# Altium PCB PCB1.pcbdoc (part 1 of 2)
Units mil, origin at the board's own origin, x right, y up, seen from the top; angles counter-clockwise.
Board outline 4560 x 3575 mil, 4 copper layers (Top Layer, GND, Inner2, Bottom Layer); 136 components, 94 nets, 575 pads, 341 vias.
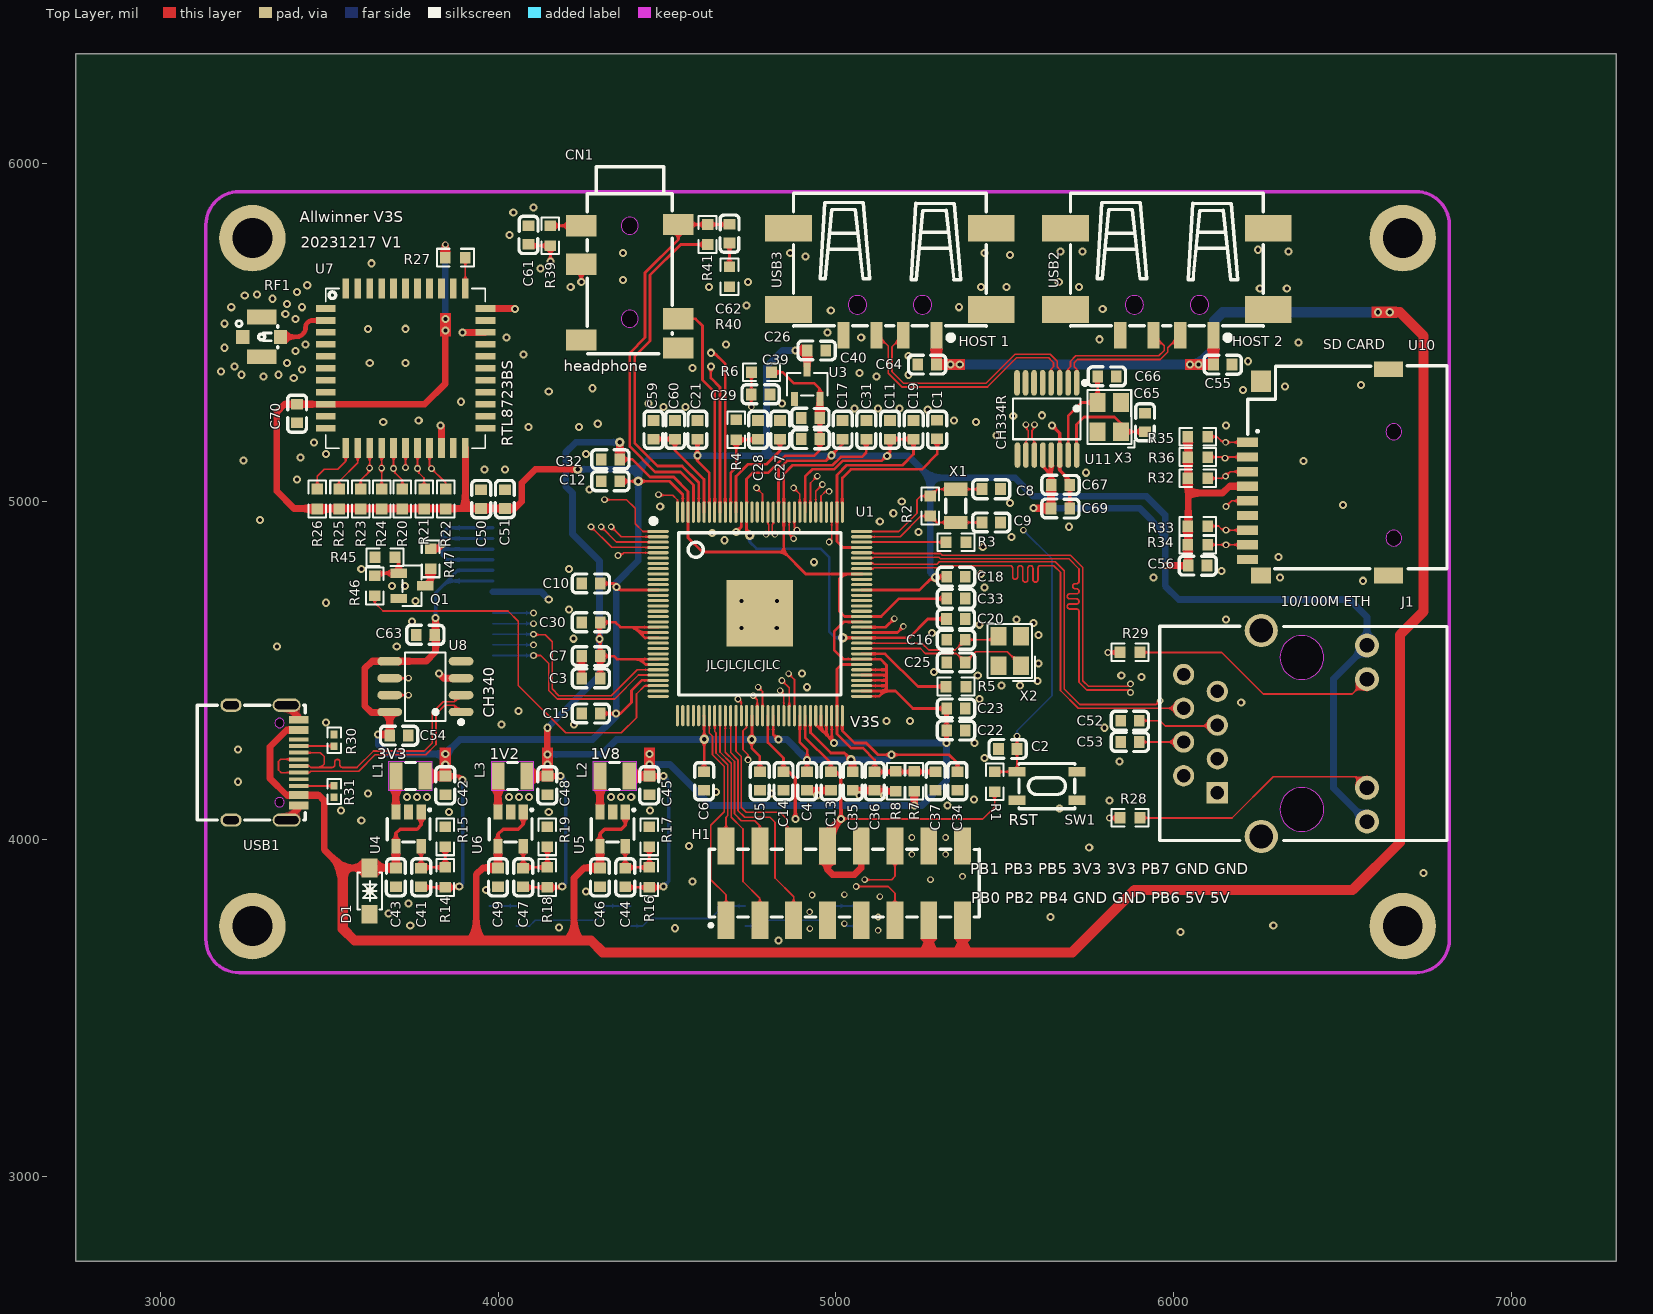
[diagram p0: Top Layer view]
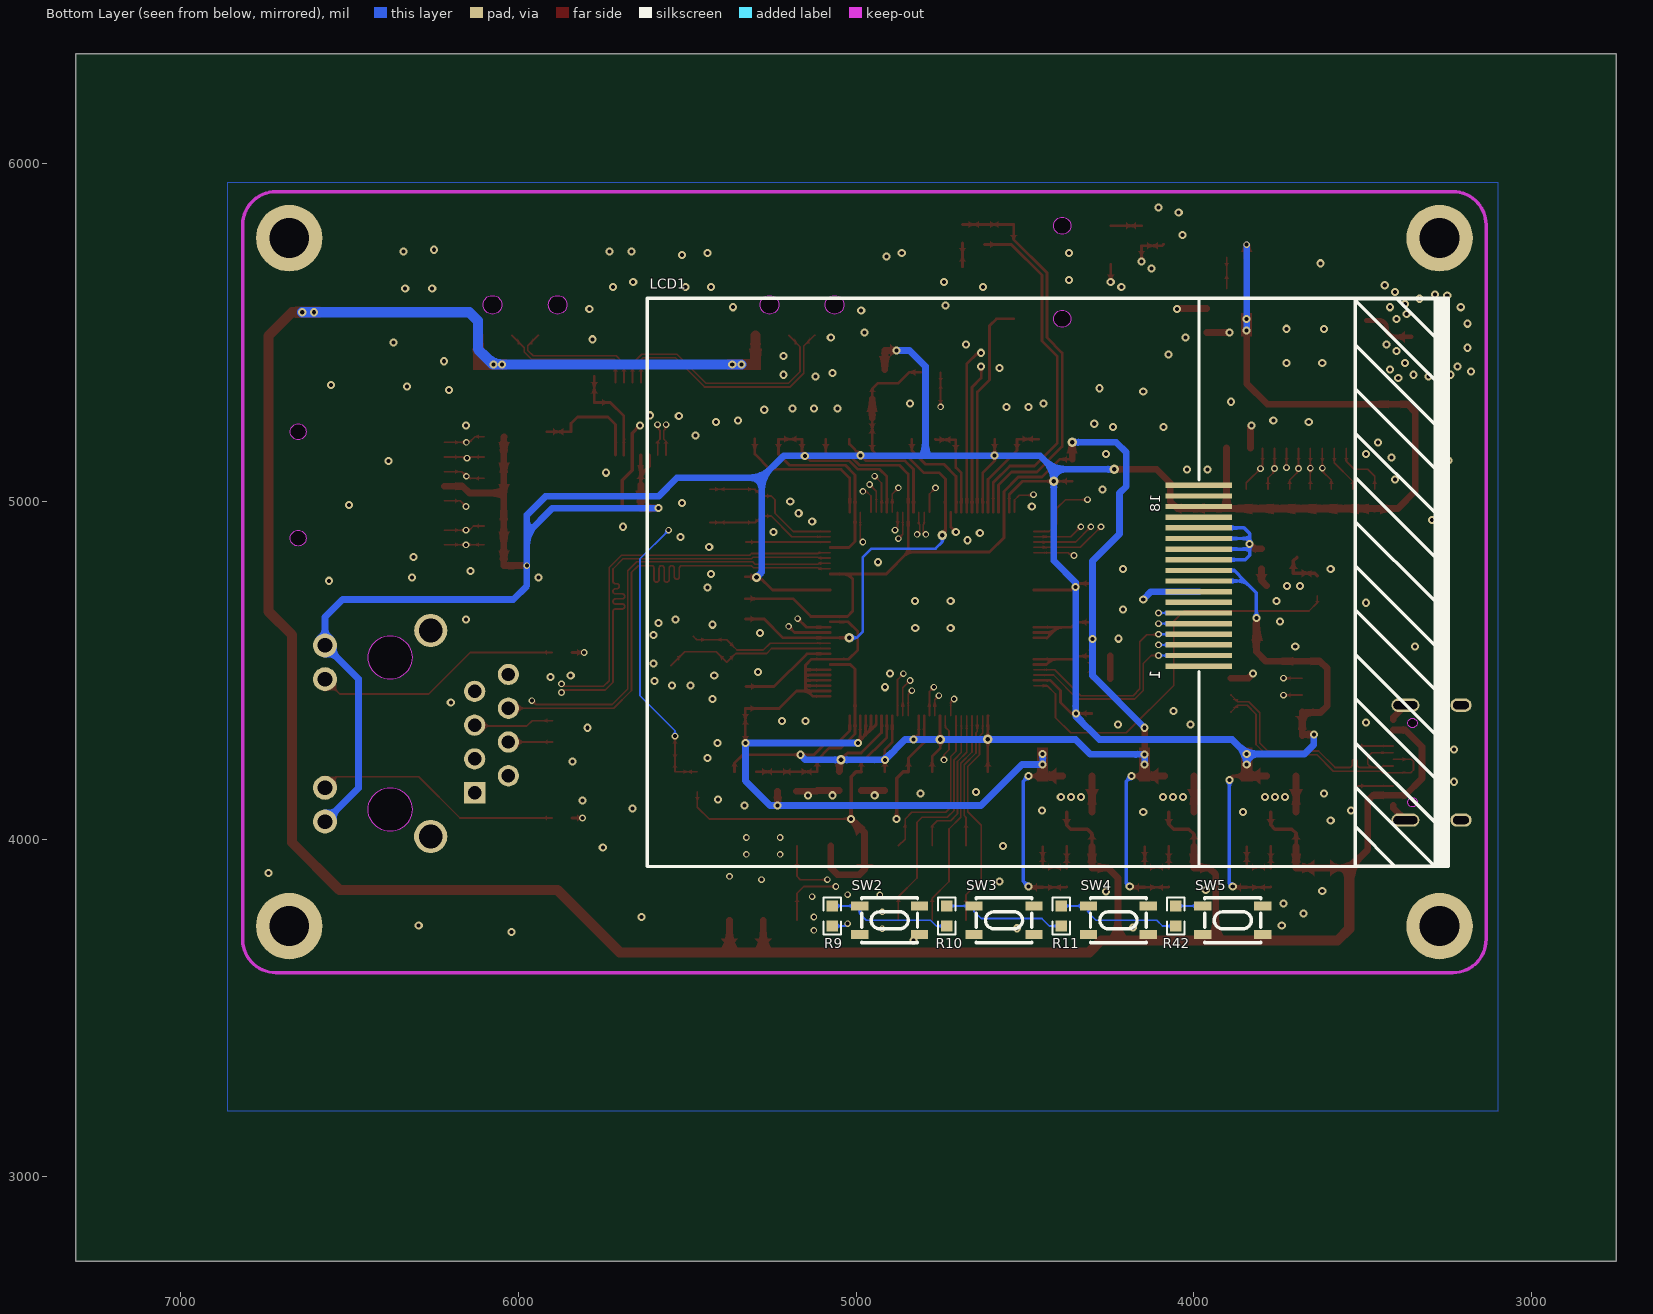
[diagram p1: Bottom Layer view, seen from below]
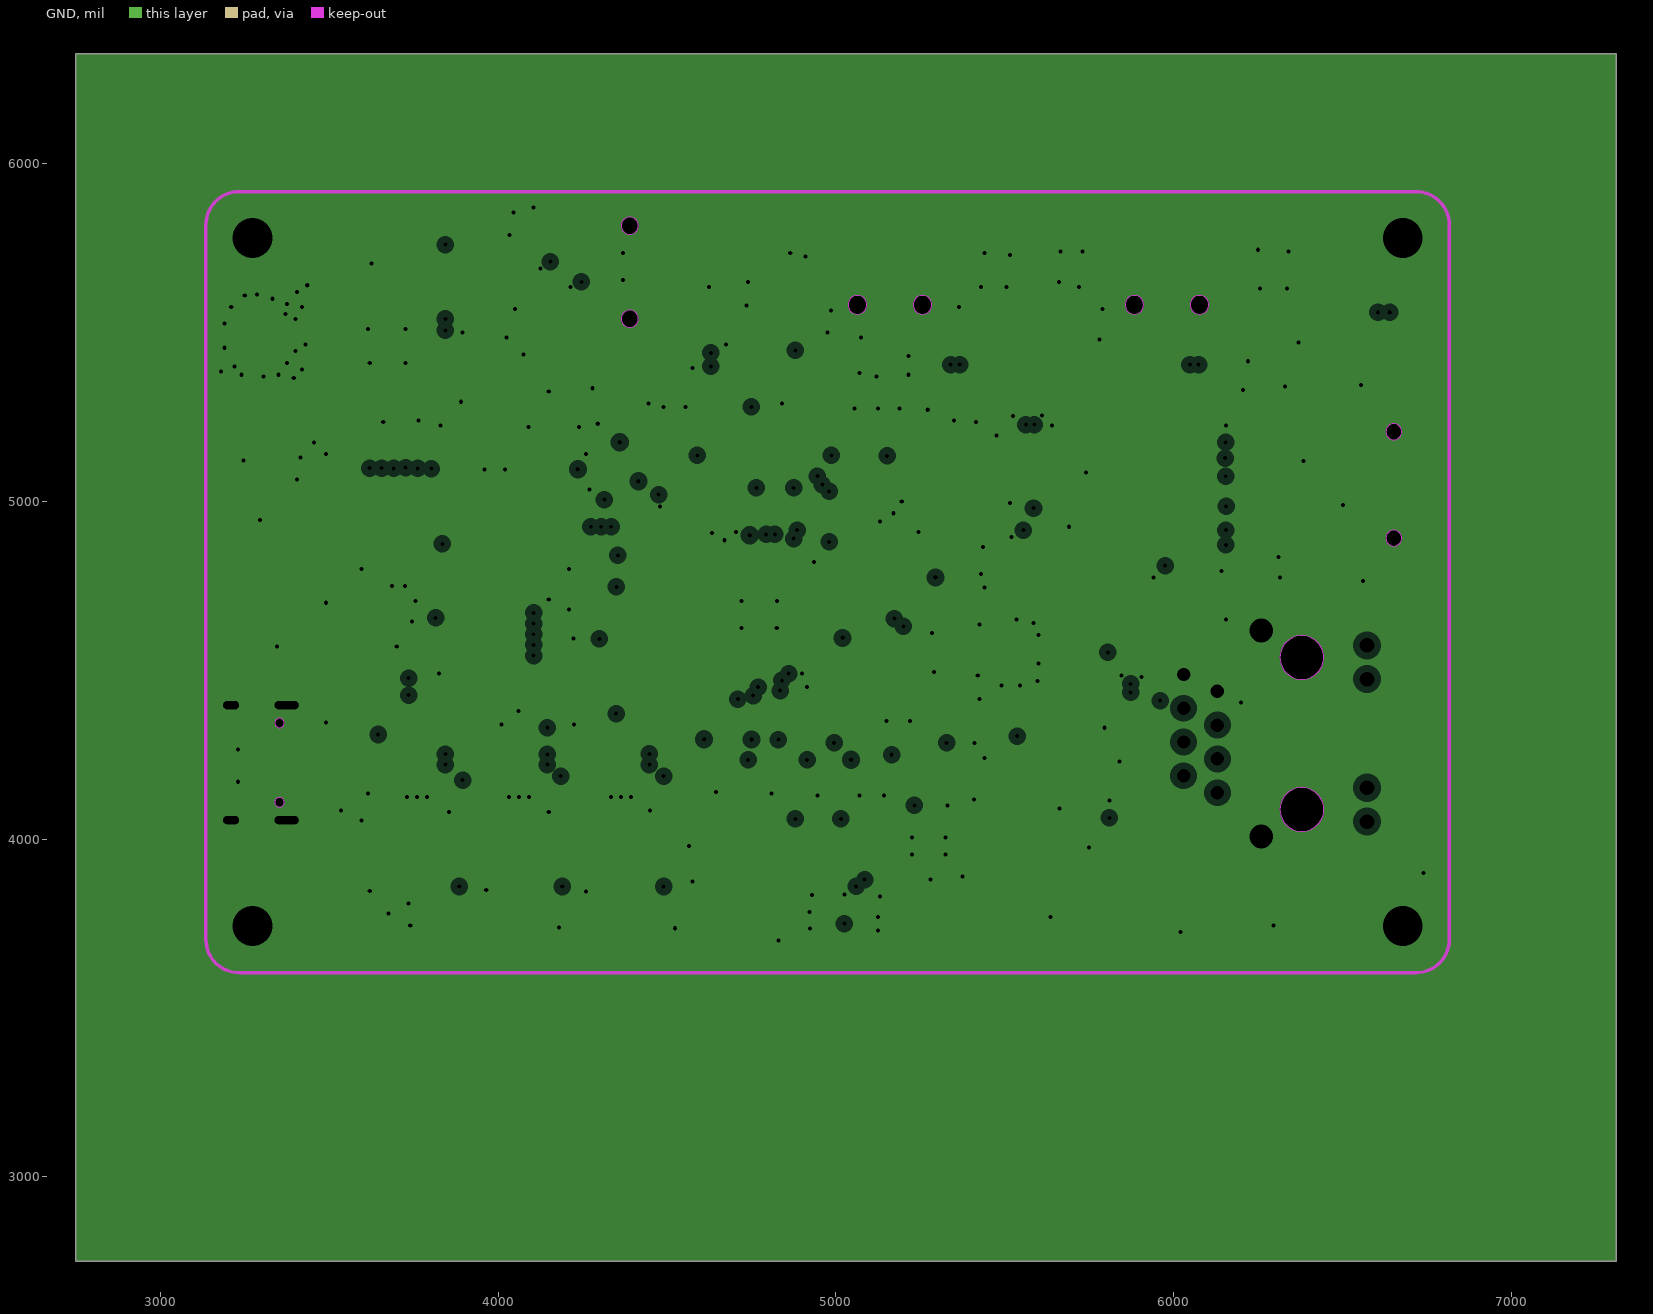
[diagram p2: GND, clearances drawn from the general rule]
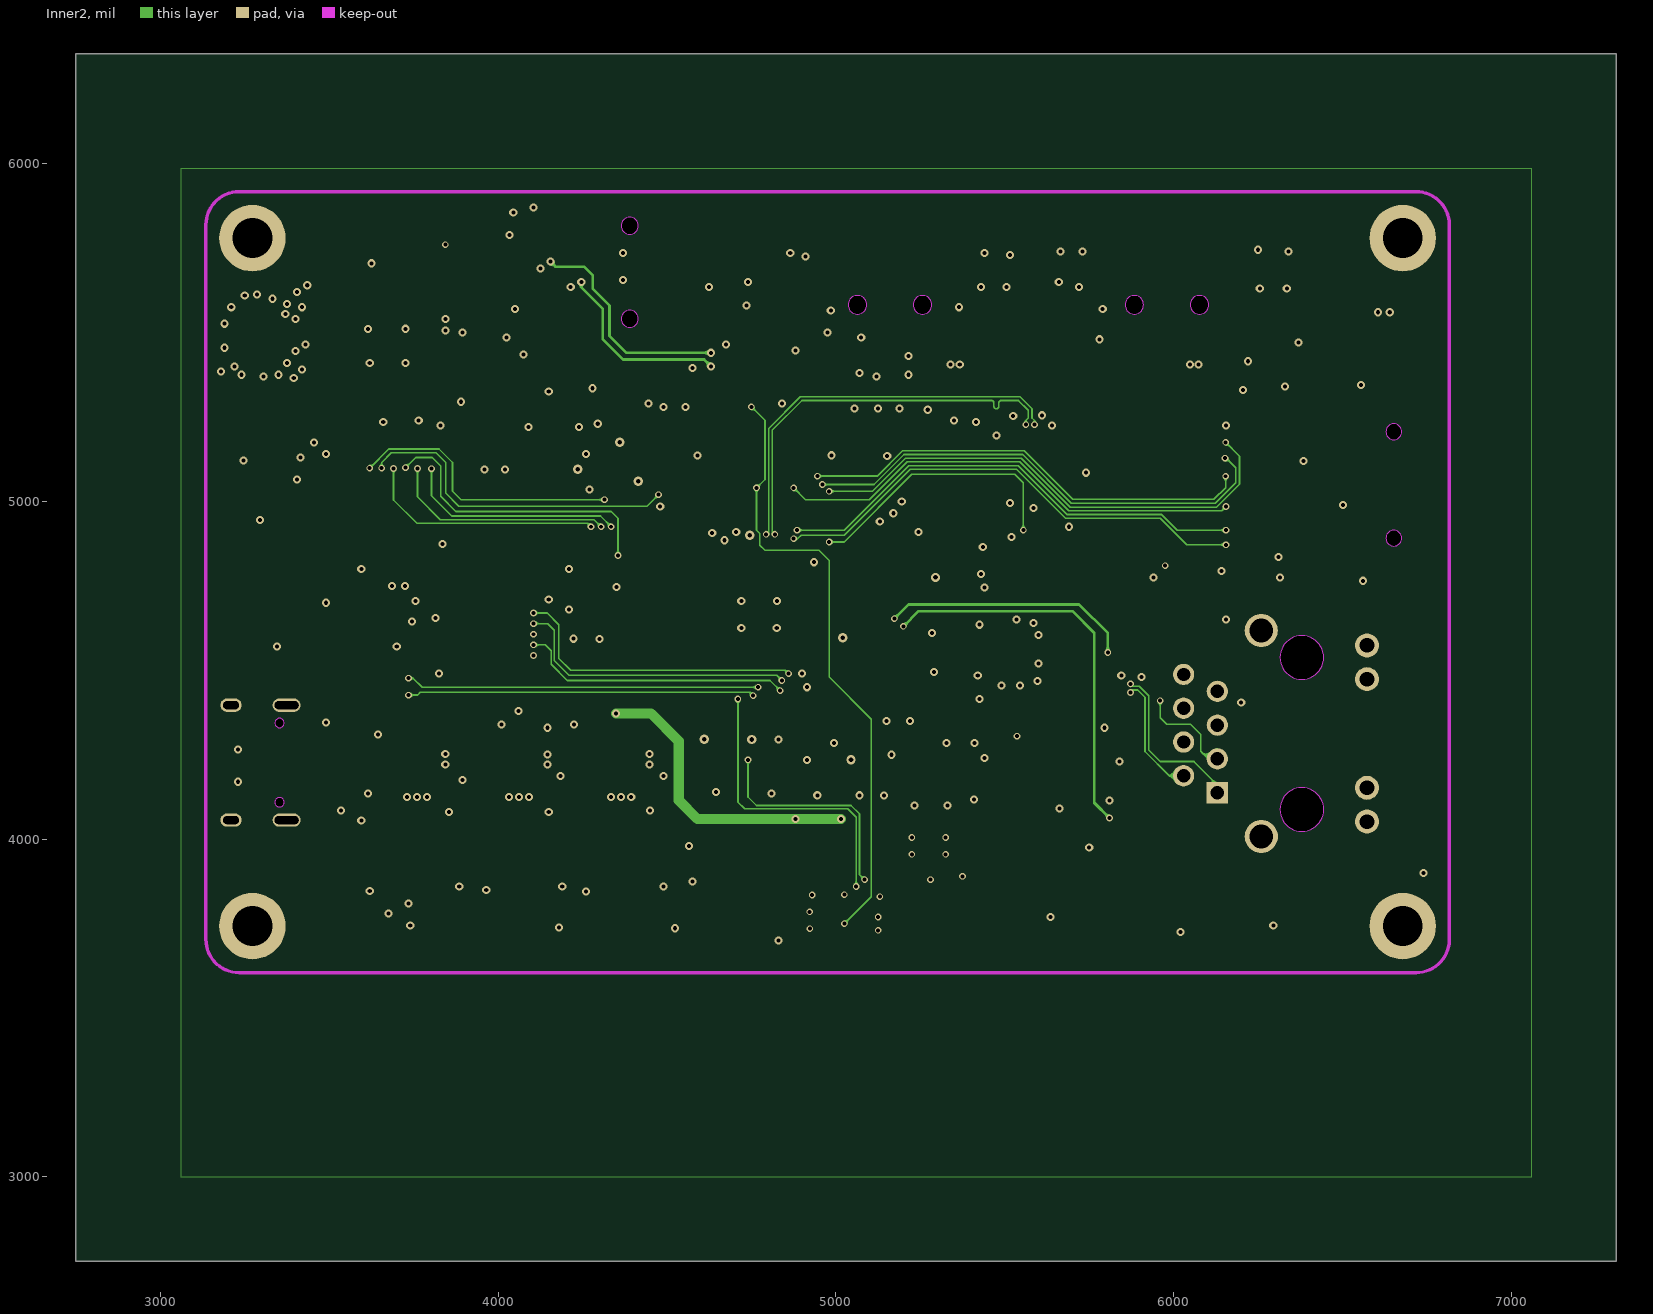
[diagram p3: Inner2]

## Layer stack, top to bottom
Top Layer: signal copper (thickness not stored)
Dielectric: dielectric 12.6, FR-4, Dk 4.8
GND: plane copper (thickness not stored)
Dielectric: dielectric 12.6, FR-4, Dk 4.8
Inner2: signal copper (thickness not stored)
Dielectric: dielectric 12.6, FR-4, Dk 4.8
Bottom Layer: signal copper (thickness not stored)

## Board outline
7310,2750 2750,2750 2750,6325 7310,6325

## Components (designator, comment, footprint, x,y, rotation, side; value= is the part's Value field where it differs from the comment)
C1 "CL10A106KP8NNNC" C0603 5300,5212.62 r90 top
C2 "CC0603KRX7R9BB104" C0603 5508.86,4267.01 r0 top
C3 "CL10A106KP8NNNC" C0603 4275,4476.07 r0 top
C4 "CC0603KRX7R9BB104" C0603 4915,4172.01 r90 top
C5 "CC0603KRX7R9BB104" C0603 4775,4172.01 r90 top
C6 "CC0603KRX7R9BB104" C0603 4610,4172.01 r90 top
C7 "CC0603KRX7R9BB104" C0603 4275,4542.01 r0 top
C8 "CL10C220JB8NNNC" C0603 5460,5036.22 r180 top
C9 "CL10C220JB8NNNC" C0603 5460,4937.79 r180 top
C10 "CL10A106KP8NNNC" C0603 4275,4757.01 r0 top
C11 "CC0603KRX7R9BB104" C0603 5160,5212.01 r270 top
C12 "CC0603KRX7R9BB104" C0603 4332.91,5059.71 r0 top
C13 "CC0603KRX7R9BB104" C0603 4985,4172.01 r90 top
C14 "CC0603KRX7R9BB104" C0603 4845,4172.01 r90 top
C15 "CC0603KRX7R9BB104" C0603 4275,4372.01 r0 top
C16 "CL10C220JB8NNNC" C0603 5355.43,4590.47 r180 top
C17 "CC0603KRX7R9BB104" C0603 5020,5212.01 r270 top
C18 "CC0603KRX7R9BB104" C0603 5355.43,4777.01 r180 top
C19 "CC0603KRX7R9BB104" C0603 5230,5212.01 r270 top
C20 "CC0603KRX7R9BB104" C0603 5355,4652.01 r180 top
C21 "CC0603KRX7R9BB104" C0603 4590,5212.01 r270 top
C22 "CL10A106KP8NNNC" C0603 5355.43,4322.01 r180 top
C23 "CC0603KRX7R9BB104" C0603 5355.43,4387.01 r180 top
C25 "CL10C220JB8NNNC" C0603 5355.43,4523.54 r180 top
C26 "CC0603KRX7R9BB104" C0603 4925,5247.31 r0 top
C27 "CL10A105KB8NNNC" C0603 4835,5212.01 r270 top
C28 "CL10A106KP8NNNC" C0603 4770,5212.01 r270 top
C29 "CL10A105KB8NNNC" C0603 4777.56,5317.01 r0 top
C30 "CL10A106KP8NNNC" C0603 4275,4642.01 r0 top
C31 "CC0603KRX7R9BB104" C0603 5090,5212.01 r270 top
C32 "CC0603KRX7R9BB104" C0603 4332.91,5124.71 r0 top
C33 "CC0603KRX7R9BB104" C0603 5355.43,4712.01 r180 top
C34 "CC0603KRX7R9BB104" C0603 5360,4172.01 r90 top
C35 "CC0603KRX7R9BB104" C0603 5050,4172.01 r90 top
C36 "CC0603KRX7R9BB104" C0603 5115,4172.01 r90 top
C37 "CC0603KRX7R9BB104" C0603 5295,4172.01 r90 top
C39 "CL10A106KP8NNNC" C0603 4925,5184.45 r180 top
C40 "CL10A106KP8NNNC" C0603 4942.72,5447.01 r180 top
C41 "CL10C220JB8NNNC" C0603 3772.36,3886.7 r270 top
C42 "CL10A106KP8NNNC" C0603 3843.74,4159.45 r90 top
C43 "CL10A106KP8NNNC" C0603 3697.56,3887.31 r90 top
C44 "CL10C220JB8NNNC" C0603 4376.49,3886.7 r270 top
C45 "CL10A106KP8NNNC" C0603 4447.86,4159.45 r90 top
C46 "CL10A106KP8NNNC" C0603 4301.69,3887.31 r90 top
C47 "CL10C220JB8NNNC" C0603 4074.43,3886.7 r270 top
C48 "CL10A106KP8NNNC" C0603 4145.8,4159.45 r90 top
C49 "CL10A106KP8NNNC" C0603 3999.63,3887.31 r90 top
C50 "CL10A106KP8NNNC" C0603 3950,5006.7 r270 top
C51 "CC0603KRX7R9BB104" C0603 4020,5006.7 r270 top
C52 "CC0603KRX7R9BB104" C0603 5870.94,4350.72 r0 top
C53 "CC0603KRX7R9BB104" C0603 5870.94,4287.74 r0 top
C54 "CC0603KRX7R9BB104" C0603 3706.61,4306.67 r180 top
C55 "CL10A106KP8NNNC" C0603 6145.35,5405 r180 top
C56 "CL10A106KP8NNNC" C0603 6071.09,4810 r180 top
C59 "CL10A106KP8NNNC" C0603 4460,5212.01 r270 top
C60 "CC0603KRX7R9BB104" C0603 4523.79,5212.01 r270 top
C61 "CL10A105KB8NNNC" C0603 4090,5788.58 r270 top
C62 "CC0603KRX7R9BB104" C0603 4685,5792.52 r270 top
C63 "CC0603KRX7R9BB104" C0603 3785,4605 r0 top
C64 "CL10A106KP8NNNC" C0603 5270.23,5405 r0 top
C65 "CL10C220JB8NNNC" C0603 5915,5233.83 r270 top
C66 "CL10C220JB8NNNC" C0603 5802.58,5370 r0 top
C67 "CC0603KRX7R9BB104" C0603 5664.73,5049.08 r180 top
C69 "CL10A106KP8NNNC" C0603 5664.47,4979.08 r180 top
C70 "CC0603KRX7R9BB104" C0603 3405,5260.15 r90 top
CN1 "PJ-342_C668606" AUDIO-SMD_PJ-342 4390,5637.01 r0 top
D1 "SMF5.0CA_C435453" SOD-123_L2.7-W1.8-LS3.7-BI 3620,3846.57 r90 top
H1 "X6521WVS-2x08H-C60D74" HDR-SMD_16P-P2.54-V-M-R2-C8-S7.4 5025,3870 r0 top
J1 "HR911105A_C12074" RJ45-TH_HR911105A 6300.94,4312.94 r90 top
L1 "PIM252010-1R5MTS00" IND-SMD_L2.5-W2.0_YXMBL252010P 3740.87,4187.01 r0 top
L2 "PIM252010-1R5MTS00" IND-SMD_L2.5-W2.0_YXMBL252010P 4345,4187.01 r0 top
L3 "PIM252010-1R5MTS00" IND-SMD_L2.5-W2.0_YXMBL252010P 4042.94,4187.01 r0 top
LCD1 "TFT_2.4_18P_SPI_ILI9341_240X320_65K_S_1" TFT_2.4_18P_SPI_ILI9341_240X320_65K_S_1 3985,4780 r90 bottom
Q1 "ao3400_c841146" SOT-23-3_L2.9-W1.3-P1.90-LS2.4-BR 3745,4750 r180 top
R1 "0603WAF1002T5E" R0603 5470,4169.91 r270 top
R2 "0603WAF5104T5E" R0603 5280,4986.28 r90 top
R3 "RS-03K6041FT" R0603 5355.73,4879.61 r0 top
R4 "0603WAF2003T5E" R0603 4705,5212.31 r270 top
R5 "0603WAF2400T5E" R0603 5355.73,4452.01 r0 top
R6 "0603WAF1003T5E" R0603 4779.66,5382.01 r180 top
R7 "0603WAF2001T5E" R0603 5232.5,4171.7 r270 top
R8 "0603WAF2001T5E" R0603 5177.5,4171.7 r90 top
R9 "0603WAF6801T5E" R0603 5070.16,3772.66 r90 bottom
R10 "0603WAF8201T5E" R0603 4731.55,3772.66 r90 bottom
R11 "0603WAF1002T5E" R0603 4392.93,3772.66 r90 bottom
R14 "0603WAF1003T5E" R0603 3843.63,3887.01 r270 top
R15 "0603WAF2212T5E" R0603 3843.63,4007.01 r270 top
R16 "0603WAF1003T5E" R0603 4447.76,3887.01 r270 top
R17 "0603WAF4992T5E" R0603 4447.76,4007.01 r270 top
R18 "0603WAF4992T5E" R0603 4145.69,3887.01 r270 top
R19 "0603WAF4992T5E" R0603 4145.69,4007.01 r270 top
R20 "0603WAF1002T5E" R0603 3716.67,5007.01 r270 top
R21 "0603WAF1002T5E" R0603 3780.83,5007.01 r270 top
R22 "0603WAF1002T5E" R0603 3845,5007.01 r270 top
R23 "0603WAF1002T5E" R0603 3593.33,5007.01 r270 top
R24 "0603WAF1002T5E" R0603 3655.13,5007.01 r270 top
R25 "0603WAF1002T5E" R0603 3529.17,5007.01 r270 top
R26 "0603WAF1002T5E" R0603 3465,5007.01 r270 top
R27 "0603WAF1002T5E" R0603 3873.51,5722.01 r180 top
R28 "0603WAF1001T5E" R0603 5870.63,4062.94 r0 top
R29 "0603WAF1001T5E" R0603 5870.63,4552.94 r0 top
R30 "0402WGF5101TCE" R0402 3514.66,4292.91 r90 top
R31 "0402WGF5101TCE" R0402 3514.66,4140.73 r270 top
R32 "0603WAF1002T5E" R0603 6071.4,5068.16 r0 top
R33 "0603WAF1002T5E" R0603 6071.4,4927.18 r0 top
R34 "0603WAF1002T5E" R0603 6071.4,4871.63 r0 top
R35 "0603WAF1002T5E" R0603 6071.4,5191.78 r0 top
R36 "0603WAF1002T5E" R0603 6071.4,5131.47 r0 top
R39 "0603WAF2001T5E" R0603 4155,5786.48 r270 top
R40 "0603WAF220JT5E" R0603 4685.11,5665 r90 top
R41 "0603WAF0000T5E" R0603 4620,5790.42 r270 top
R42 "0603WAF1102T5E" R0603 4054.31,3772.66 r90 bottom
R45 "0603WAF1002T5E" R0603 3665,4835 r0 top
R46 "0603WAF1000T5E" R0603 3635,4750 r90 top
R47 "0603WAF100JT5E" R0603 3800,4830 r90 top
RF1 "KH-IPEX-K501-29" ANT-SMD_KH-IPEX-K501-29 3300,5487.01 r270 top
SW1 "TS-KG89S-AT25F" SW-SMD_4P-L4.2-W3.3-P2.15-LS5.1 5625,4157.24 r0 top
SW2 "TS-KG89S-AT25F" SW-SMD_4P-L4.2-W3.3-P2.15-LS5.1 4900.86,3760 r0 bottom
SW3 "TS-KG89S-AT25F" SW-SMD_4P-L4.2-W3.3-P2.15-LS5.1 4562.24,3760 r0 bottom
SW4 "TS-KG89S-AT25F" SW-SMD_4P-L4.2-W3.3-P2.15-LS5.1 4223.62,3760 r0 bottom
SW5 "TS-KG89S-AT25F" SW-SMD_4P-L4.2-W3.3-P2.15-LS5.1 3885,3760 r0 bottom
U1 "V3S_1" "LQFP129 14x14_N" 4775,4667.01 r270 top
U3 "XC6206P302MR_C347375" SOT-23-3_L3.0-W1.7-P0.95-LS2.9-BR 4915.16,5347.01 r270 top
U4 "SY8089A1AAC" TSOT-23-5_L2.9-W1.6-P0.95-LS2.8-BR 3735,4029.67 r90 top
U5 "SY8089A1AAC" TSOT-23-5_L2.9-W1.6-P0.95-LS2.8-BR 4339.13,4029.67 r90 top
U6 "SY8089A1AAC" TSOT-23-5_L2.9-W1.6-P0.95-LS2.8-BR 4037.06,4029.67 r90 top
U7 "RTL8723BS_Module" R8723BS 3730,5397.01 r0 top
U8 "CH340N" SOP-8_L4.9-W3.9-P1.27-LS6.0-BL 3784.66,4451.67 r90 top
U10 "HX TF PUSH" TF-SMD_TF-PUSH 6427.51,5086.19 r90 top
U11 "CH334R" QSOP-16_L4.9-W3.9-P0.635-LS6.0-BL 5624.47,5244.17 r180 top
USB1 "TYPEC-304-BCP16_C720629" USB-C-SMD_TYPEC-304-BCP16 3309.66,4226.67 r270 top
USB2 "10.0 QTJ6.3" USB-A-SMD_10.0-QTJ6.3 5980,5650 r180 top
USB3 "10.0 QTJ6.3" USB-A-SMD_10.0-QTJ6.3 5160,5650 r180 top
X1 "Q13FC1350000400" FC-135R_L3.2-W1.5 5355,4987.01 r90 top
X2 "XL2EL89COI-111YLC-24M" CRYSTAL-SMD_4P-L3.2-W2.5-BL 5515,4557.01 r90 top
X3 "XL2EL89COI-111YLC-12M" OSC-SMD_4P-L3.2-W2.5-BL 5809.47,5249.58 r90 top

## Footprints (in the part's own frame and the unit in brackets; to place one, negate y for a bottom-side part, rotate by r counter-clockwise, add the part's x,y. Pads: shape width x height; smd on the part's side, far side on the other; paste and mask are expansions set on the pad)
ANT-SMD_KH-IPEX-K501-29 [mm]
  rect 1.05x1 smd: 1(0,-1.425) 4(0,1.425)
  rect 1.1x2.2 smd: 2(-1.5,0) 3(1.5,0)
  silkscreen extent -1.22,-1.92 0.84,1.23
AUDIO-SMD_PJ-342 [mm]
  rect 2.3x1.6 smd: 2(-3.65,4.55) 3(3.65,4.65) 4(-3.65,1.65) 5(3.65,-2.45) 6(-3.65,-4.05) 7(3.65,-4.65)
  Multi-Layer board cut-out: 0.65,4.55 0.562,4.873 0.324,5.109 0,5.196 -0.324,5.109 -0.562,4.873 -0.65,4.55 -0.65,4.55 -0.562,4.227 -0.324,3.99 0,3.904 0.324,3.99 0.562,4.227 0.65,4.55
  Multi-Layer board cut-out: 0.65,-2.45 0.562,-2.127 0.324,-1.891 0,-1.804 -0.324,-1.891 -0.562,-2.127 -0.65,-2.45 -0.65,-2.45 -0.562,-2.773 -0.324,-3.01 0,-3.096 0.324,-3.01 0.562,-2.773 0.65,-2.45
  Multi-Layer keep-out region: 0.65,4.55 0.562,4.873 0.324,5.109 0,5.196 -0.324,5.109 -0.562,4.873 -0.65,4.55 -0.65,4.55 -0.562,4.227 -0.324,3.99 0,3.904 0.324,3.99 0.562,4.227 0.65,4.55
  Multi-Layer keep-out region: 0.65,-2.45 0.562,-2.127 0.324,-1.891 0,-1.804 -0.324,-1.891 -0.562,-2.127 -0.65,-2.45 -0.65,-2.45 -0.562,-2.773 -0.324,-3.01 0,-3.096 0.324,-3.01 0.562,-2.773 0.65,-2.45
  silkscreen extent -3.2,-5.1 3.2,8.99
C0603 [mm]
  rect 0.8x0.9 smd: 1(-0.7,0) 2(0.7,0)
  silkscreen extent -1.41,-0.71 1.39,0.72
CRYSTAL-SMD_4P-L3.2-W2.5-BL [mm]
  rect 1.4x1.2 smd: 1(-1.1,-0.85) 2(1.1,-0.85) 3(1.1,0.85) 4(-1.1,0.85)
  silkscreen extent -2.26,-1.91 2.03,1.68
FC-135R_L3.2-W1.5 [mm]
  rect 1x1.8 smd: 1(-1.25,0) 2(1.25,0)
  silkscreen extent -0.51,-0.76 0.51,0.76
HDR-SMD_16P-P2.54-V-M-R2-C8-S7.4 [mm]
  rect 1.27x2.8 smd: 1(-8.89,-2.8) 2(-8.89,2.8) 3(-6.35,-2.8) 4(-6.35,2.8) 5(-3.81,-2.8) 6(-3.81,2.8) 7(-1.27,-2.8) 8(-1.27,2.8) 9(1.27,-2.8) 10(1.27,2.8) 11(3.81,-2.8) 12(3.81,2.8) 13(6.35,-2.8) 14(6.35,2.8) 15(8.89,-2.8) 16(8.89,2.8)
  silkscreen extent -10.16,-3.3 10.16,2.53
IND-SMD_L2.5-W2.0_YXMBL252010P [mm]
  rect 1x2 smd: 1(1.1,0) 2(-1.1,0)
  silkscreen extent -0.37,-1.02 0.37,1.02
"LQFP129 14x14_N" [mm]
  oval 0.23x1.6 smd: 1(-6.2,-7.648) 2(-5.8,-7.648) 3(-5.4,-7.648) 4(-5,-7.648) 5(-4.6,-7.648) 6(-4.2,-7.648) 7(-3.8,-7.648) 8(-3.4,-7.648) 9(-3,-7.648) 10(-2.6,-7.648) 11(-2.2,-7.648) 12(-1.8,-7.648) 13(-1.4,-7.648) 14(-1,-7.648) 15(-0.6,-7.648) 16(-0.2,-7.648) 17(0.2,-7.648) 18(0.6,-7.648) 19(1,-7.648) 20(1.4,-7.648) 21(1.8,-7.648) 22(2.2,-7.648) 23(2.6,-7.648) 24(3,-7.648) 25(3.4,-7.648) 26(3.8,-7.648) 27(4.2,-7.648) 28(4.6,-7.648) 29(5,-7.648) 30(5.4,-7.648) 31(5.8,-7.648) 32(6.2,-7.648) 65(6.2,7.653) 66(5.8,7.653) 67(5.4,7.653) 68(5,7.653) 69(4.6,7.653) 70(4.2,7.653) 71(3.8,7.653) 72(3.4,7.653) 73(3,7.653) 74(2.6,7.653) 75(2.2,7.653) 76(1.8,7.653) 77(1.4,7.653) 78(1,7.653) 79(0.6,7.653) 80(0.2,7.653) 81(-0.2,7.653) 82(-0.6,7.653) 83(-1,7.653) 84(-1.4,7.653) 85(-1.8,7.653) 86(-2.2,7.653) 87(-2.6,7.653) 88(-3,7.653) 89(-3.4,7.653) 90(-3.8,7.653) 91(-4.2,7.653) 92(-4.6,7.653) 93(-5,7.653) 94(-5.4,7.653) 95(-5.8,7.653) 96(-6.2,7.653)
  oval 1.6x0.23 smd: 33(7.651,-6.198) 34(7.651,-5.798) 35(7.651,-5.398) 36(7.651,-4.998) 37(7.651,-4.598) 38(7.651,-4.198) 39(7.651,-3.798) 40(7.651,-3.398) 41(7.651,-2.998) 42(7.651,-2.598) 43(7.651,-2.198) 44(7.651,-1.798) 45(7.651,-1.398) 46(7.651,-0.998) 47(7.651,-0.598) 48(7.651,-0.198) 49(7.651,0.202) 50(7.651,0.602) 51(7.651,1.002) 52(7.651,1.402) 53(7.651,1.802) 54(7.651,2.202) 55(7.651,2.602) 56(7.651,3.002) 57(7.651,3.402) 58(7.651,3.802) 59(7.651,4.202) 60(7.651,4.602) 61(7.651,5.002) 62(7.651,5.402) 63(7.651,5.802) 64(7.651,6.202) 97(-7.651,6.202) 98(-7.651,5.802) 99(-7.651,5.402) 100(-7.651,5.002) 101(-7.651,4.602) 102(-7.651,4.202) 103(-7.651,3.802) 104(-7.651,3.402) 105(-7.651,3.002) 106(-7.651,2.602) 107(-7.651,2.202) 108(-7.651,1.802) 109(-7.651,1.402) 110(-7.651,1.002) 111(-7.651,0.602) 112(-7.651,0.202) 113(-7.651,-0.198) 114(-7.651,-0.598) 115(-7.651,-0.998) 116(-7.651,-1.398) 117(-7.651,-1.798) 118(-7.651,-2.198) 119(-7.651,-2.598) 120(-7.651,-2.998) 121(-7.651,-3.398) 122(-7.651,-3.798) 123(-7.651,-4.198) 124(-7.651,-4.598) 125(-7.651,-4.998) 126(-7.651,-5.398) 127(-7.651,-5.798) 128(-7.651,-6.198)
  rect 5x5 smd: 129(-0.038,-0.01)
  silkscreen extent -7.11,-8.13 6.1,6.1
OSC-SMD_4P-L3.2-W2.5-BL [mm]
  rect 1.4x1.2 smd: 1(-1.1,-0.875) 2(1.1,-0.875) 3(1.1,0.875) 4(-1.1,0.875)
  silkscreen extent -2.29,-1.9 2.03,1.65
QSOP-16_L4.9-W3.9-P0.635-LS6.0-BL [mm]
  oval 0.42x1.922 smd: 1(-2.24,-2.716) 2(-1.6,-2.716) 3(-0.96,-2.716) 4(-0.32,-2.716) 5(0.32,-2.716) 6(0.96,-2.716) 7(1.6,-2.716) 8(2.24,-2.716) 9(2.205,2.716) 10(1.57,2.716) 11(0.935,2.716) 12(0.3,2.716) 13(-0.335,2.716) 14(-0.97,2.716) 15(-1.605,2.716) 16(-2.24,2.716)
  silkscreen extent -3.02,-2.87 2.53,1.53
R0402 [mm]
  rect 0.566x0.54 smd: 1(-0.433,0) 2(0.433,0)
  silkscreen extent -0.94,-0.5 0.94,0.5
R0603 [mil]
  rect 31.75x34.02 smd: 1(-29.66,0) 2(29.66,0)
  silkscreen extent -55,-26 55,26
R8723BS [mm]
  rect 1.5x0.5 smd: 1(-6.102,4.424) 2(-6.102,3.524) 3(-6.102,2.624) 4(-6.102,1.724) 5(-6.102,0.824) 6(-6.102,-0.076) 7(-6.102,-0.976) 8(-6.102,-1.876) 9(-6.102,-2.776) 10(-6.102,-3.676) 11(-6.102,-4.576) 23(5.898,-4.576) 24(5.898,-3.676) 25(5.898,-2.776) 26(5.898,-1.876) 27(5.898,-0.976) 28(5.898,-0.076) 29(5.898,0.824) 30(5.898,1.724) 31(5.898,2.624) 32(5.898,3.524) 33(5.898,4.424)
  rect 0.5x1.5 smd: 12(-4.602,-6.076) 13(-3.702,-6.076) 14(-2.802,-6.076) 15(-1.902,-6.076) 16(-1.002,-6.076) 17(-0.102,-6.076) 18(0.798,-6.076) 19(1.698,-6.076) 20(2.598,-6.076) 21(3.498,-6.076) 22(4.398,-6.076) 34(4.398,5.924) 35(3.498,5.924) 36(2.598,5.924) 37(1.698,5.924) 38(0.798,5.924) 39(-0.102,5.924) 40(-1.002,5.924) 41(-1.902,5.924) 42(-2.802,5.924) 43(-3.702,5.924) 44(-4.602,5.924)
  silkscreen extent -6.1,-6.08 5.9,5.92
RJ45-TH_HR911105A [mm]
  rect 1.6x1.6 hole 1: 1(-4.45,4.355)
  round 1.6 hole 1: 2(-3.18,6.895) 3(-1.91,4.355) 4(-0.64,6.895) 5(0.63,4.355) 6(1.9,6.895) 7(3.17,4.355) 8(4.44,6.895)
  round 1.8 hole 1.1: 9(-6.625,-6.895) 10(-4.085,-6.895) 11(4.085,-6.895) 12(6.625,-6.895)
  round 2.5 hole 1.8: SH1(-7.745,1.055) SH2(7.745,1.055)
  Multi-Layer board cut-out: -5.715,-3.645 -4.893,-3.422 -4.291,-2.818 -4.072,-1.995 -4.292,-1.172 -4.893,-0.568 -5.715,-0.345 -5.715,-0.345 -6.537,-0.568 -7.139,-1.172 -7.359,-1.995 -7.139,-2.818 -6.537,-3.422 -5.715,-3.645
  Multi-Layer board cut-out: 5.715,-3.645 6.535,-3.42 7.135,-2.817 7.354,-1.995 7.135,-1.173 6.535,-0.57 5.715,-0.345 5.715,-0.345 4.895,-0.57 4.295,-1.173 4.076,-1.995 4.295,-2.817 4.895,-3.42 5.715,-3.645
  Multi-Layer keep-out region: -5.715,-3.645 -4.893,-3.422 -4.291,-2.818 -4.072,-1.995 -4.292,-1.172 -4.893,-0.568 -5.715,-0.345 -5.715,-0.345 -6.537,-0.568 -7.139,-1.172 -7.359,-1.995 -7.139,-2.818 -6.537,-3.422 -5.715,-3.645
  Multi-Layer keep-out region: 5.715,-3.645 6.535,-3.42 7.135,-2.817 7.354,-1.995 7.135,-1.173 6.535,-0.57 5.715,-0.345 5.715,-0.345 4.895,-0.57 4.295,-1.173 4.076,-1.995 4.295,-2.817 4.895,-3.42 5.715,-3.645
  silkscreen extent -8.05,-12.92 8.05,8.68
SOD-123_L2.7-W1.8-LS3.7-BI [mm]
  rect 1.4x1.2 smd: 1(-1.735,0) 2(1.735,0)
  silkscreen extent -1.38,-0.93 1.38,0.93
SOP-8_L4.9-W3.9-P1.27-LS6.0-BL [mm]
  oval 0.63x1.865 smd: 1(-1.905,-2.682) 2(-0.635,-2.682) 3(0.635,-2.682) 4(1.905,-2.682) 5(1.905,2.682) 6(0.635,2.682) 7(-0.635,2.682) 8(-1.905,2.682)
  silkscreen extent -2.82,-2.83 2.58,1.52
SOT-23-3_L2.9-W1.3-P1.90-LS2.4-BR [mm]
  rect 1.25x0.7 smd: 1(1,-0.95) 2(1,0.95) 3(-1,0)
  silkscreen extent -0.73,-1.53 0.73,1.53
SOT-23-3_L3.0-W1.7-P0.95-LS2.9-BR [mil]
  rect 40.85x20.95 smd: 1(43.36,-37.4) 2(43.36,37.4) 3(-43.36,0)
  silkscreen extent -34,-60 34,60
SW-SMD_4P-L4.2-W3.3-P2.15-LS5.1 [mm]
  rect 1.3x0.7 smd: 1(-2.25,1.075) 2(2.25,1.075) 3(-2.25,-1.075) 4(2.25,-1.075)
  silkscreen extent -2.1,-1.7 2.1,1.7
TF-SMD_TF-PUSH [mm]
  rect 0.7x1.6 smd: 1(2.25,5.3) 2(1.15,5.3) 3(0.05,5.3) 4(-1.05,5.3) 5(-2.15,5.3) 6(-3.25,5.3) 7(-4.35,5.3) 8(-5.45,5.3) CD(-6.55,5.3)
  rect 1.2x1.5 smd: 10(-7.75,4.3)
  rect 1.2x2.2 smd: 11(-7.75,-5.3) 12(7.75,-5.3)
  rect 1.6x1.5 smd: 13(6.85,4.3)
  Multi-Layer board cut-out: -4.95,-6.3 -4.653,-6.217 -4.436,-5.998 -4.357,-5.7 -4.436,-5.402 -4.653,-5.183 -4.95,-5.1 -4.95,-5.1 -5.247,-5.183 -5.464,-5.402 -5.543,-5.7 -5.464,-5.998 -5.247,-6.217 -4.95,-6.3
  Multi-Layer board cut-out: 3.05,-6.3 3.347,-6.217 3.564,-5.998 3.643,-5.7 3.564,-5.402 3.347,-5.183 3.05,-5.1 3.05,-5.1 2.753,-5.183 2.536,-5.402 2.457,-5.7 2.536,-5.998 2.753,-6.217 3.05,-6.3
  Multi-Layer keep-out region: -4.95,-6.3 -4.653,-6.217 -4.436,-5.998 -4.357,-5.7 -4.436,-5.402 -4.653,-5.183 -4.95,-5.1 -4.95,-5.1 -5.247,-5.183 -5.464,-5.402 -5.543,-5.7 -5.464,-5.998 -5.247,-6.217 -4.95,-6.3
  Multi-Layer keep-out region: 3.05,-6.3 3.347,-6.217 3.564,-5.998 3.643,-5.7 3.564,-5.402 3.347,-5.183 3.05,-5.1 3.05,-5.1 2.753,-5.183 2.536,-5.402 2.457,-5.7 2.536,-5.998 2.753,-6.217 3.05,-6.3
  silkscreen extent -7.26,-9.7 8,5.3
TFT_2.4_18P_SPI_ILI9341_240X320_65K_S_1 [mm]
  rect 0.4x5 smd: 1(-6.8,0) 2(-6,0) 3(-5.2,0) 4(-4.4,0) 5(-3.6,0) 6(-2.8,0) 7(-2,0) 8(-1.2,0) 9(-0.4,0) 10(0.4,0) 11(1.2,0) 12(2,0) 13(2.8,0) 14(3.6,0) 15(4.4,0) 16(5.2,0) 17(6,0) 18(6.8,0)
  silkscreen extent -21.87,-18.8 20.85,41.5
TSOT-23-5_L2.9-W1.6-P0.95-LS2.8-BR [mm]
  rect 1.1x0.7 smd: 1(1.294,-0.951) 2(1.294,-0.001) 3(1.294,0.951) 4(-1.294,0.951) 5(-1.294,-0.949)
  silkscreen extent -0.97,-1.65 1.52,1.61
USB-A-SMD_10.0-QTJ6.3 [mm]
  rect 0.92x2 smd: 1(-3.5,4.025) 2(-1,4.025) 3(1,4.025) 4(3.5,4.025)
  rect 3.5x2 smd: 5(7.625,2.075) 6(7.625,-4.025) 7(-7.625,-4.025) 8(-7.625,2.075)
  Multi-Layer board cut-out: -3.15,1.724 -3.081,1.42 -2.886,1.177 -2.606,1.042 -2.294,1.042 -2.014,1.177 -1.819,1.42 -1.75,1.724 -1.75,1.724 -1.819,2.028 -2.014,2.271 -2.294,2.407 -2.606,2.407 -2.887,2.271 -3.081,2.028 -3.15,1.724
  Multi-Layer board cut-out: 1.75,1.724 1.819,1.42 2.014,1.177 2.294,1.042 2.606,1.042 2.887,1.177 3.081,1.42 3.15,1.724 3.15,1.724 3.081,2.028 2.887,2.271 2.606,2.407 2.294,2.407 2.014,2.271 1.819,2.028 1.75,1.724
  Multi-Layer keep-out region: -3.15,1.724 -3.081,1.42 -2.886,1.177 -2.606,1.042 -2.294,1.042 -2.014,1.177 -1.819,1.42 -1.75,1.724 -1.75,1.724 -1.819,2.028 -2.014,2.271 -2.294,2.407 -2.606,2.407 -2.887,2.271 -3.081,2.028 -3.15,1.724
  Multi-Layer keep-out region: 1.75,1.724 1.819,1.42 2.014,1.177 2.294,1.042 2.606,1.042 2.887,1.177 3.081,1.42 3.15,1.724 3.15,1.724 3.081,2.028 2.887,2.271 2.606,2.407 2.294,2.407 2.014,2.271 1.819,2.028 1.75,1.724
  silkscreen extent -7.25,-6.67 7.25,4.39
USB-C-SMD_TYPEC-304-BCP16 [mil]
  oval 39.4x82.7 hole 23.6 slot 70.9 at 90 deg: 13(-170.1,64.3) 14(170.1,64.3)
  oval 39.4x63 hole 23.6 slot 47.2 at 90 deg: 15(-170.1,-100.3) 16(170.1,-100.3)
  rect 23.6x57.1 smd: A1B12(-127,100.3) A4B9(-96.5,100.3) B1A12(126.8,100.3) B4A9(96.5,100.3)
  rect 11.8x57.1 smd: A5(-49.2,100.3) A6(-9.8,100.3) A7(9.8,100.3) A8(49.2,100.3) B5(68.9,100.3) B6(29.5,100.3) B7(-29.5,100.3) B8(-68.9,100.3)
  Multi-Layer board cut-out: 117.3,57.2 111.31,55.83 106.51,52 103.84,46.47 103.84,40.33 106.51,34.79 111.31,30.96 117.3,29.6 117.3,29.6 123.29,30.96 128.09,34.79 130.76,40.33 130.76,46.47 128.09,52 123.29,55.83 117.3,57.2
  Multi-Layer board cut-out: -117.3,57.2 -123.29,55.83 -128.09,52 -130.76,46.47 -130.76,40.33 -128.09,34.79 -123.29,30.96 -117.3,29.6 -117.3,29.6 -111.31,30.96 -106.51,34.79 -103.84,40.33 -103.84,46.47 -106.51,52 -111.31,55.83 -117.3,57.2
  Multi-Layer keep-out region: 117.3,57.2 111.31,55.83 106.51,52 103.84,46.47 103.84,40.33 106.51,34.79 111.31,30.96 117.3,29.6 117.3,29.6 123.29,30.96 128.09,34.79 130.76,40.33 130.76,46.47 128.09,52 123.29,55.83 117.3,57.2
  Multi-Layer keep-out region: -117.3,57.2 -123.29,55.83 -128.09,52 -130.76,46.47 -130.76,40.33 -128.09,34.79 -123.29,30.96 -117.3,29.6 -117.3,29.6 -111.31,30.96 -106.51,34.79 -103.84,40.33 -103.84,46.47 -106.51,52 -111.31,55.83 -117.3,57.2
  silkscreen extent -170,-200 170,120

## Free pads (board coordinates)
  round 196.85 hole 118.11: 2(3272.8,3742.8) 2(3272.8,5779.37) 2(6678.31,3742.8) 2(6678.31,5779.37)

## Via types
v1: diameter 24.02, hole 12.01, Top Layer to Bottom Layer, 200 vias
v2: diameter 24, hole 12, Top Layer to Bottom Layer, 60 vias
v3: diameter 19.68, hole 11.81, Top Layer to Bottom Layer, 41 vias
v4: diameter 19.7, hole 11.81, Top Layer to Bottom Layer, 31 vias
v5: diameter 27.56, hole 13.78, Top Layer to Bottom Layer, 9 vias

## Nets (pads, with @x,y where several pads share a name; then routed paths per layer and width w, separated by ;. In a path a pad name is that pad's centre, name@x,y a point inside that pad or via, vN(x,y) a via of type N, cw(c..) or ccw(c..) an arc to the next point about the centre after c; other vN are vias at no path point)
1V2: C3.2 C4.2 C5.2 C6.2 C7.2 C30.2 C31.2 C32.2 C33.2 C34.2 C35.2 C47.2 C48.2 L3.1 R18.2 U1.19 U1.20 U1.21 U1.25 U1.26 U1.38 U1.47 U1.51 U1.56 U1.58 U1.64 U1.80 U1.88 U1.108 U1.126 | length 6821.1
  Top Layer w8: C47.2@4074.43,3859.14 4076.22,3857.35 R18.2@4145.69,3857.35 ; C32.2@4360.47,5124.71 4397.3,5124.71 4450,5072.01 4520,5072.01 4562.5,5029.51 U1.126@4562.5,4968.22 4562.5,4892.5 4605,4850 4845.96,4850 ; U1.26@4473.88,4517.4 4436.34,4517.4 4420.6,4533.15 ; U1.25@4473.88,4533.15 4420.6,4533.15 ; U1.21@4473.88,4596.14 4434.91,4596.14 4419.16,4611.89 ; U1.20@4473.88,4611.89 4419.16,4611.89 ; U1.19@4473.88,4627.64 4403.41,4627.64 ; U1.38@4609.74,4365.8 4610,4365.54 v5(4610,4295.96) C6.2@4610,4199.57 ; U1.47@4751.47,4365.8 4751.47,4295.9 v5(4750.57,4295) 4750.57,4269.43 4775,4245 C5.2@4775,4199.57 ; U1.51@4814.46,4365.8 4814.46,4310.54 v1(4830,4295) ; U1.56@4893.2,4365.8 4893.2,4286.8 4915,4265 v1(4915,4235) C4.2@4915,4199.57 ; U1.58@4924.7,4365.8 4924.7,4315.3 4985,4255 5025,4255 v5(5045,4235) ; U1.64@5019.19,4365.8 5019.19,4320.81 5055,4285 5090,4285 5125,4250 v1@5164.27,4250 ; U1.88@5076.31,4785.12 5025.12,4785.12 ; C31.2@5090,5184.45 5090,5145 5077.02,5132.02 5015.02,5132.02 4990.02,5107.02 4872.02,5107.02 4845.96,5080.96 U1.108@4845.96,4968.22 4845.96,4850 ; v1(5165,4250) 5335,4250 5360,4225 C34.2@5360,4199.57 ; C33.2@5327.87,4712.01 5187.01,4712.01 5134.13,4659.13 U1.80@5076.31,4659.13 5025.87,4659.13 5010,4675 5010,4770 5025.12,4785.12 ; 4403.41,4627.64 4419.16,4611.89 ; 4403.41,4627.64 4362.36,4627.64 4347.99,4642.01 C30.2@4302.56,4642.01 4300,4639.45 v1(4300,4593.08) 4302.56,4590.52 C7.2@4302.56,4542.01 4342.99,4542.01 4351.85,4533.15 4420.6,4533.15 ; 4845.96,4850 4910.84,4785.12 5025.12,4785.12
  Top Layer w10: R18.2@4145.69,3857.35 4187.35,3857.35 v2(4190,3860) ; C48.2@4145.8,4187.01 v2(4185,4187.01) ; C3.2@4302.56,4476.07 C7.2@4302.56,4542.01
  Top Layer w20: L3.1@4086.25,4187.01 C48.2@4145.8,4187.01 ; v2(4145.8,4251.33) v1(4145.8,4330) ; v5(4360,5175) 4360,5125.18 C32.2@4360.47,5124.71 ; v5(5045,4235) 5050,4230 C35.2@5050,4199.57 ; v1@5164.27,4250 v1(5165,4250)
  Bottom Layer w10: v2(4185,4187.01) 4200,4172.01 4200,3870 v2(4190,3860)
  Bottom Layer w20: v2(4145.8,4220.8) v2(4145.8,4251.33) 4306.33,4251.33 4350,4295 v5(4750.57,4295) v1(4830,4295) 4855,4295 v1(4915,4235) v5(5045,4235) 5150,4235 v1(5165,4250) ; v1(4145.8,4330) 4300,4484.2 v1(4300,4593.08) 4300,4823.66 4220,4903.66 4220,5025 4200,5045 4200,5145 4230,5175 v5(4360,5175)
1V8: C22.2 C23.2 C44.2 C45.2 L2.1 R7.2 R16.2 U1.59 U1.60 U1.61 U1.62 U1.65 U1.66 U1.67 U1.68 U1.69 U1.70 U1.72 U1.79 | length 3455.5
  Top Layer w8: C44.2@4376.49,3859.14 4378.28,3857.35 R16.2@4447.76,3857.35 ; U1.59@4940.45,4365.8 4940.45,4339.55 4956.2,4323.8 ; U1.60@4956.2,4365.8 4956.2,4323.8 ; U1.61@4971.94,4365.8 4971.94,4308.06 ; U1.62@4987.69,4365.8 4987.69,4294.87 4986.41,4293.59 ; v1(4995,4285) 4986.41,4293.59 ; U1.65@5076.31,4422.91 5127.85,4422.91 5143.6,4438.66 ; U1.66@5076.31,4438.66 5143.6,4438.66 ; U1.67@5076.31,4454.41 5150,4454.41 ; U1.68@5076.31,4470.16 5150,4470.16 ; U1.69@5076.31,4485.91 5150,4485.91 ; U1.70@5076.31,4501.65 5150,4501.65 ; U1.79@5076.31,4643.39 5023.39,4643.39 4995,4615 4995,4560 5021.85,4533.15 U1.72@5076.31,4533.15 5131.85,4533.15 5150,4515 5150,4501.65 ; v1(5327.87,4285) C22.2@5327.87,4322.01 C23.2@5327.87,4387.01 5227.99,4387.01 5176.34,4438.66 5143.6,4438.66 ; 4956.2,4323.8 4971.94,4308.06 ; 4971.94,4308.06 4986.41,4293.59 ; 5143.6,4438.66 5150,4445.06 5150,4454.41 ; 5150,4454.41 5150,4470.16 ; 5150,4470.16 5150,4485.91 ; 5150,4485.91 5150,4501.65
  Top Layer w10: R16.2@4447.76,3857.35 4487.35,3857.35 v2(4490,3860) ; C45.2@4447.86,4187.01 v2(4490,4187.01)
  Top Layer w20: L2.1@4388.31,4187.01 C45.2@4447.86,4187.01 ; v1(5232.5,4100) R7.2@5232.5,4142.04
  Bottom Layer w10: v2(4490,3860) 4505,3875 4505,4172.01 v2(4490,4187.01)
  Bottom Layer w20: v2(4447.86,4252.42) v2(4447.86,4220.8) 4509.2,4220.8 4630,4100 v1(5232.5,4100) 5255,4100 5327.87,4172.87 v1(5327.87,4285) v1(4995,4285)
3V0: C20.2 C26.2 C39.1 R6.1 U1.76 U1.115 U3.2 | length 1638.1
  Top Layer w8: v5(4745,4900) 4735.72,4909.28 U1.115@4735.72,4968.22 4735.72,5065.72 4755,5085 4800,5085 4850,5135 4935,5135 4952.56,5152.56 C39.1@4952.56,5184.45 C26.2@4952.56,5247.31 ; R6.1@4809.32,5382.01 4842.99,5382.01 4875,5350 4935,5350 4952.56,5332.44 U3.2@4952.56,5303.65 ; v5(5020,4596.14) U1.76@5076.31,4596.14 5216.14,4596.14 5272.01,4652.01 C20.2@5327.44,4652.01
  Top Layer w20: C26.2@4952.56,5247.31 U3.2@4952.56,5303.65
  Bottom Layer w8: v5(4745,4900) 4745,4880 4765,4860 4955,4860 4980,4835 4980,4615 4998.86,4596.14 v5(5020,4596.14)
3V3: C10.2 C11.2 C12.2 C13.2 C14.2 C15.2 C17.2 C18.2 C19.2 C21.2 C40.2 C41.2 C42.2 C50.2 C51.2 C54.2 C56.2 C63.2 C67.2 C69.2 C70.2 H1.8 H1.10 J1.9 J1.12 L1.1 LCD1.9 LCD1.10 R1.2 R14.2 R20.2 R21.2 R22.2 R23.2 R24.2 R25.2 R26.2 R27.2 R32.1 R33.1 R34.1 R35.1 R36.1 U1.12 U1.29 U1.50 U1.57 U1.85 U1.93 U1.98 U1.104 U1.109 U1.122 U1.127 U3.3 U7.9 U7.22 U8.5 U8.8 U10.4 U11.12 U11.13 | length 16072.1
  Top Layer w5: v1(5015,4060) 5435,4060 5470,4095 R1.2@5470,4140.25
  Top Layer w8: C41.2@3772.36,3859.14 3774.16,3857.35 R14.2@3843.63,3857.35 ; C15.2@4302.56,4372.01 v1(4349.41,4372.01) 4362.01,4372.01 4395,4405 4395,4440 4425.16,4470.16 U1.29@4473.88,4470.16 ; C10.2@4302.56,4757.01 4342.99,4757.01 4362.13,4737.87 U1.12@4473.88,4737.87 ; C12.2@4360.47,5059.71 v5(4415.22,5059.71) 4507.3,5059.71 4546.75,5020.26 U1.127@4546.75,4968.22 ; C21.2@4590,5184.45 v1(4590,5136.41) 4590,5120 4625.49,5084.51 U1.122@4625.49,4968.22 ; U1.50@4798.72,4365.8 4798.72,4286.28 4845,4240 C14.2@4845,4199.57 ; U1.109@4830.21,4968.22 4830.21,5095.21 4855,5120 4970,5120 v1(4986.59,5136.59) 5020,5170 C17.2@5020,5184.45 ; U1.57@4908.95,4365.8 4908.95,4301.05 4985,4225 C13.2@4985,4199.57 ; U1.104@4908.95,4968.22 4908.95,5073.95 4930,5095 4995,5095 5020,5120 5135,5120 5160,5145 C11.2@5160,5184.45 C19.2@5230,5184.45 5230,5140 5197,5107 5032,5107 5003.44,5078.44 U1.98@5003.44,4968.22 5003.44,4881.56 5021.14,4863.86 U1.93@5076.31,4863.86 ; U1.85@5076.31,4737.87 5247.87,4737.87 5287.01,4777.01 5295.5,4777.01 C18.2@5327.87,4777.01
  Top Layer w10: R14.2@3843.63,3857.35 3882.35,3857.35 v2(3885,3860) ; C42.2@3843.74,4187.01 3882.99,4187.01 v2(3895,4175) ; C14.2@4845,4199.57 4860.43,4199.57 4880,4180 v1(4880,4060) ; C13.2@4985,4199.57 5000.43,4199.57 5015,4185 v1(5015,4060) ; U11.12@5612.66,5137.25 5612.66,5104.22 5637.16,5079.71 ; C67.2@5637.16,5049.08 5637.16,5079.71 ; U11.13@5637.66,5137.25 5637.16,5136.75 5637.16,5079.71
  Top Layer w20: R26.2@3465,4977.35 R26.2@3466.8,4979.14 ; v2(3645,4310) 3675.72,4310 C54.2@3679.05,4306.67 U8.8@3679.05,4376.67 ; U8.8@3670,4375 3625,4375 3605,4395 3605,4505 3626.67,4526.67 U8.5@3679.05,4526.67 3786.67,4526.67 3815,4555 v1(3815,4655) ; L1.1@3784.18,4187.01 C42.2@3843.74,4187.01 ; v1(3843.85,5506.27) 3843.85,5348.85 3782.71,5287.71 U7.9@3489.78,5287.71 C70.2@3405,5287.71 3367.71,5287.71 3345,5265 3345,5030 3395.86,4979.14 R26.2@3466.8,4979.14 ; R27.2@3843.85,5722.01 v3(3843.85,5760) ; U7.22@3903.17,5157.79 3903.17,4979.14 ; v5(4236.12,5095) 4110,5095 4070,5055 4070,5000 4049.14,4979.14 C51.2@4020,4979.14 C50.2@3950,4979.14 3903.17,4979.14 ; v1(4880,5447.01) C40.2@4915.16,5447.01 U3.3@4915.16,5390.37 ; v1(5015,4060) 4975,4020 H1.8@4975,3980.24 4975,3910 4990,3895 5055,3895 5075,3915 H1.10@5075,3980.24 ; v5(5295,4775) 5295.5,4775.5 v5@5295.5,4777.01 ; v1(5585,4980) 5635.99,4980 C69.2@5636.91,4979.08 5636.91,5048.82 C67.2@5637.16,5049.08 ; v3(5975,4810) C56.2@6043.53,4810 6043.53,5025 ; R35.1@6041.74,5191.78 6043.53,5189.98 6043.53,5025 ; U10.4@6218.85,5044.85 6164.85,5044.85 6145,5025 6043.53,5025 ; R26.2@3466.8,4979.14 3903.17,4979.14
  Inner2 w30: v1(4349.41,4372.01) 4452.99,4372.01 4535,4290 4535,4115 4590,4060 v1(4880,4060) v1(5015,4060)
  Bottom Layer w10: v1(3815,4655) 3815,4730 3849.24,4764.24 ; v2(3885,3860) 3895,3870 v2(3895,4175) ; LCD1.9@3985,4764.24 3849.24,4764.24 ; LCD1.10@3985,4795.74 3880.74,4795.74 3849.24,4764.24
  Bottom Layer w20: v2(3645,4310) 3645,4280 3672.94,4252.06 v2(3843.74,4252.06) ; v2(3843.74,4220.8) v2(3843.74,4252.06) ; v1(3843.85,5506.27) v1(3843.85,5540) v3(3843.85,5760) ; v5(4236.12,5095) 4415,5095 ; v1(4880,5447.01) 4842.01,5447.01 4795,5400 4795,5135 ; v5(5295,4775) 5279.59,4790.41 5279.59,5070 ; v1(5585,4980) 5899.32,4980 5975,4904.32 ; J1.9@6572.39,4052.11 6473.47,4151.03 6473.47,4474.86 J1.12@6572.39,4573.77 6572.39,4657.61 6520,4710 6015,4710 5975,4750 v3(5975,4810) 5975,4904.32 ; v2(3843.74,4252.06) 3886.68,4295 4280,4295 4350,4365 v1(4350,4746.89) 4350,4760 4415,4825 4415,5095 ; 4415,5095 4455,5135 4795,5135 ; 4795,5135 v1(5151.99,5135) 5214.59,5135 5279.59,5070 ; 5279.59,5070 5530,5070 5585,5015 5920,5015 5975,4960 5975,4904.32
$1N1128: R3.1 U1.94 | length 249.8
  Top Layer w5: U1.94@5076.31,4879.61 R3.1@5326.07,4879.61
$1N5958: R9.2 R10.1 SW2.4 | length 376.6
  Bottom Layer w5: R10.1@4731.55,3743.01 4763.01,3743.01 4780,3760 4970,3760 4989.44,3779.44 SW2.4@4989.44,3802.32 R9.2@5070.16,3802.32
$1N5967: R10.2 R11.1 SW3.4 | length 372.9
  Bottom Layer w5: R11.1@4392.93,3743.01 4428.01,3743.01 4450,3765 4630,3765 4650.82,3785.82 SW3.4@4650.82,3802.32 R10.2@4731.55,3802.32
$1N15779: R11.2 R42.1 SW4.4 | length 375
  Bottom Layer w5: R42.1@4054.31,3743.01 4093.01,3743.01 4110,3760 4290,3760 4312.2,3782.2 SW4.4@4312.2,3802.32 R11.2@4392.93,3802.32
$1N15784: R42.2 SW5.4 | length 80.7
  Bottom Layer w5: SW5.4@3973.58,3802.32 R42.2@4054.31,3802.32
$3N1524: C52.2 J1.5 | length 238.6
  Top Layer w5: C52.2@5898.49,4350.72 5959.28,4350.72 5975,4335 6126.74,4335 J1.5@6129.48,4337.74
$3N1525: C53.2 J1.4 | length 131
  Top Layer w5: C53.2@5898.49,4287.74 J1.4@6029.48,4287.74
$3N2072: J1.11 R29.2 | length 741.2
  Top Layer w5: R29.2@5900.29,4552.94 6142.06,4552.94 6265,4430 6528.62,4430 J1.11@6572.39,4473.77
$3N2117: J1.10 R28.2 | length 736.3
  Top Layer w5: R28.2@5900.29,4062.94 6172.94,4062.94 6295,4185 6539.5,4185 J1.10@6572.39,4152.11
$4N2809: C62.2 R40.2 | length 70.3
  Top Layer w8: C62.2@4685,5764.96 4685.11,5764.85 R40.2@4685.11,5694.66
$4N4161: Q1.1 R45.2 R46.2 | length 126
  Top Layer w10: R46.2@3635,4779.66 3642.74,4787.4 Q1.1@3705.63,4787.4 3705.63,4824.03 R45.2@3694.66,4835
$4N9013: Q1.3 R47.1 | length 56.8
  Top Layer w20: Q1.3@3784.37,4750 3800,4765.63 R47.1@3800,4800.34
+5V: C43.2 C46.2 C49.2 C55.2 C64.2 D1.2 H1.13 H1.15 U4.1 U4.4 U5.1 U5.4 U6.1 U6.4 USB1.A4B9 USB1.B4A9 USB2.1 USB3.1 | length 8891.5
  Top Layer w10: U4.4@3697.56,3978.73 3697.56,4017.56 3710,4030 3760,4030 3772.44,4042.44 U4.1@3772.44,4080.62 ; U6.4@3999.63,3978.73 3999.63,4014.63 4015,4030 4060,4030 4074.51,4044.51 U6.1@4074.51,4080.62 ; U5.4@4301.69,3978.73 4301.69,4016.69 4315,4030 4365,4030 4376.57,4041.57 U5.1@4376.57,4080.62
  Top Layer w20: USB1.A4B9@3409.96,4323.17 3374.4,4323.17 3325,4273.77 3325,4179.57 3374.4,4130.17 USB1.B4A9@3409.96,4130.17 3469.83,4130.17 3485,4115 3485,3970 3540.13,3914.87 D1.2@3620,3914.87 C43.2@3697.56,3914.87 U4.4@3697.56,3978.73 ; 3935,3700 3935,3894.87 3955,3914.87 C49.2@3999.63,3914.87 U6.4@3999.63,3978.73 ; 4225,3700 4225,3885 4254.87,3914.87 C46.2@4301.69,3914.87 U5.4@4301.69,3978.73 ; 5275,3665 H1.13@5275,3759.76 ; 5375,3665 H1.15@5375,3759.76
  Top Layer w30: 3540.13,3914.87 3540.13,3734.87 3575,3700 3935,3700 4225,3700 4275,3700 4310,3665 5275,3665 5375,3665 5700,3665 5885,3850 6530,3850 6670,3990 6670,4605 6740,4675 6740,5490 6670,5560 v1(6639.8,5560) ; C64.2@5297.79,5405 USB3.1@5297.79,5491.53 ; C55.2@6117.79,5405 USB2.1@6117.79,5491.53
  Bottom Layer w30: v1(5339.84,5405) v1(5366.79,5405) v1(6048.33,5405) v1(6074.12,5405) 6120,5450.88 6120,5535 6145,5560 v1(6605,5560) v1(6639.8,5560)
BT_RST: R27.1 U7.34 | length 91.8
  Top Layer w5: U7.34@3903.17,5630.23 R27.1@3903.17,5722.01
CARD_SDC_CLK: U1.105 U10.5 | length 1556.4
  Top Layer w5: v3(4875,5040) 4893.2,5021.8 U1.105@4893.2,4968.22 ; v3(6155,4985) 6171.55,5001.55 U10.5@6218.85,5001.55
  Inner2 w5: v3(4875,5040) 4910,5005 5098.89,5005 5210.89,5117 5544.11,5117 5689.11,4972 6142,4972 v3(6155,4985)
CARD_SDC_CMD: R32.2 U1.103 U10.3 | length 1588.9
  Top Layer w5: U1.103@4924.7,4968.22 4924.7,5054.7 v3(4945,5075) ; R32.2@6101.06,5068.16 6147.54,5068.16 6167.54,5088.16 U10.3@6218.85,5088.16
  Inner2 w5: v3(4945,5075) 5122.22,5075 5197.22,5150 5557.81,5150 5701.78,5006 6118.95,5006 6153.88,5040.93 v4(6153.88,5074.5)
CARD_SDC_D0: R33.2 U1.106 U10.7 | length 1607.3
  Top Layer w5: U1.106@4877.46,4968.22 4877.46,4922.54 v3(4885,4915) ; R33.2@6101.06,4927.18 6132.82,4927.18 6145.07,4914.93 U10.7@6218.85,4914.93
  Inner2 w5: v3(4885,4915) 5024.44,4915 5215.44,5106 5539.56,5106 5684.56,4961 5964.56,4961 6010.63,4914.93 v4(6154.85,4914.93)
CARD_SDC_D1: R34.2 U1.107 U10.8 | length 1658.8
  Top Layer w5: U1.107@4861.71,4968.22 4861.71,4903.29 v3(4875,4890) ; R34.2@6101.06,4871.63 v4(6154.85,4871.63) U10.8@6218.85,4871.63
  Inner2 w5: v3(4875,4890) 4887.34,4890 4897.34,4900 5025,4900 5220,5095 5535,5095 5680,4950 5960,4950 6038.37,4871.63 v4(6154.85,4871.63)
CARD_SDC_D2: R35.2 U1.101 U10.1 | length 1687
  Top Layer w5: U1.101@4956.2,4968.22 4956.2,5016.2 4970,5030 v3(4980,5030) ; R35.2@6101.06,5191.78 6128.22,5191.78 6145.22,5174.78 U10.1@6218.85,5174.78
  Inner2 w5: v3(4980,5030) 5108.33,5030 5206.33,5128 5548.72,5128 5693.67,4983 6127.06,4983 6195,5050.94 6195,5133.61 v4(6153.83,5174.78)
CARD_SDC_D3: R36.2 U1.102 U10.2 | length 1641.1
  Top Layer w5: U1.102@4940.45,4968.22 4940.45,5030.45 v3(4960,5050) ; R36.2@6101.06,5131.47 U10.2@6218.85,5131.47
  Inner2 w5: v3(4960,5050) 5112.77,5050 5201.77,5139 5553.26,5139 5697.23,4995 6123.5,4995 6184,5055.5 6184,5100 6156,5128 v4(6152.23,5128)
CH340_D+: U8.1 USB1.A6 USB1.B6 | length 774.1
  Top Layer w5: USB1.A6@3409.96,4236.47 3356.47,4236.47 3350,4230 3350,4205 3357.83,4197.17 USB1.B6@3409.96,4197.17 3441.01,4197.17 3445.36,4201.52 3587.08,4201.52 3635.56,4250 3785.56,4250 3816,4280.44 3816,4370 3842.17,4396.17 3870.77,4396.17 U8.1@3890.27,4376.67
CH340_D-: U8.2 USB1.A7 USB1.B7 | length 774.1
  Top Layer w5: USB1.A7@3409.96,4216.87 3441.01,4216.87 3445.36,4212.52 3474.82,4212.52 ; USB1.B7@3409.96,4256.17 3473.83,4256.17 3485,4245 3485,4222.7 3474.82,4212.52 ; U8.2@3890.27,4426.67 3870.77,4407.17 3837.61,4407.17 3805,4374.56 3805,4285 3781,4261 3631,4261 3582.52,4212.52 3539.04,4212.52 cw(c3539.04,4220.02) 3531.54,4220.02 3531.54,4228.71 ccw(c3524.04,4228.71) 3516.54,4228.71 3516.54,4220.02 cw(c3509.04,4220.02) 3509.04,4212.52 3474.82,4212.52
DM3: U11.3 USB3.2 | length 736
  Top Layer w5: USB3.2@5199.37,5491.53 5166,5458.16 5166,5384 5200,5350 5444.44,5350 5530.44,5436 5634.56,5436 5655.16,5415.39 5655.16,5398.51 5662.26,5391.41 U11.3@5662.26,5351.09
DM4: U11.1 USB2.2 | length 417.2
  Top Layer w5: U11.1@5712.66,5351.09 5712.66,5391.41 5705.56,5398.51 5705.56,5410.56 5715,5420 5960.56,5420 5982.77,5442.21 5982.77,5454.93 USB2.2@6019.37,5491.53
DP3: U11.4 USB3.3 | length 738.1
  Top Layer w5: USB3.3@5120.63,5491.53 5123.47,5491.53 5155,5460 5155,5379.44 5195.44,5339 5449,5339 5535,5425 5630,5425 5644.16,5410.84 5644.16,5398.51 5637.07,5391.41 U11.4@5637.07,5351.09
DP4: U11.2 USB2.3 | length 414.9
  Top Layer w5: U11.2@5687.46,5351.09 5687.46,5391.41 5694.56,5398.51 5694.56,5415.12 5710.44,5431 5956,5431 5971.77,5446.77 5971.77,5460.4 USB2.3@5940.63,5491.53
ETH_LED_LINK: R28.1 U1.77 | length 1338.4
  Top Layer w8: U1.77@5076.31,4611.89 5181.89,4611.89 v3(5200,4630) ; v3(5810,4062.94) R28.1@5840.97,4062.94
  Inner2 w8: v3(5200,4630) 5245,4675 5700,4675 5765,4610 5765,4107.94 v3(5810,4062.94)
ETH_LED_SPD: R29.1 U1.78 | length 884.8
  Top Layer w8: U1.78@5076.31,4627.64 5147.64,4627.64 v4(5172.94,4652.94) ; v3(5805,4552.94) R29.1@5840.97,4552.94
  Inner2 w8: v4(5172.94,4652.94) 5215,4695 5720,4695 5805,4610 v3(5805,4552.94)
ETH_RXN: J1.6 U1.89 | length 1574.7
  Top Layer w5: U1.89@5076.31,4800.87 5110.3,4800.87 5112.68,4803.24 5303.8,4803.24 5310.56,4810 5515.87,4810 cw(c5515.87,4802.5) 5523.37,4802.5 5523.37,4777.21 ccw(c5530.87,4777.21) 5538.37,4777.21 5538.37,4802.5 cw(c5545.87,4802.5) 5553.37,4802.5 5553.37,4768.54 ccw(c5560.87,4768.54) 5568.37,4768.54 5568.37,4802.5 cw(c5575.87,4802.5) 5583.37,4802.5 5583.37,4768.54 ccw(c5590.87,4768.54) 5598.37,4768.54 5598.37,4802.5 cw(c5605.87,4802.5) 5605.87,4810 5645,4810 5665,4790 5665,4440 5717.26,4387.74 J1.6@6029.48,4387.74
ETH_RXP: J1.3 U1.90 | length 1574.7
  Top Layer w5: U1.90@5076.31,4816.61 5110.3,4816.61 5112.68,4814.24 5299.24,4814.24 5306,4821 5649.56,4821 5676,4794.56 5676,4444.56 5721.81,4398.74 5948.74,4398.74 v3(5960,4410) ; J1.3@6127.22,4240 J1.3@6129.48,4237.74
  Inner2 w5: v3(5960,4410) 5960,4360 5980,4340 6050,4340 6080,4310 6080,4260 6102.26,4237.74 J1.3@6129.48,4237.74
ETH_TXN: J1.2 U1.91 | length 1657.1
  Top Layer w5: U1.91@5076.31,4832.36 5110.3,4832.36 5112.68,4834.74 5305.26,4834.74 5310,4830 5690,4830 5720,4800 5720,4763.99 cw(c5712.5,4763.99) 5712.5,4756.49 5708.89,4756.49 ccw(c5708.89,4748.99) 5708.89,4741.49 5712.5,4741.49 cw(c5712.5,4733.99) 5712.5,4726.49 5692.5,4726.49 ccw(c5692.5,4718.99) 5692.5,4711.49 5712.5,4711.49 cw(c5712.5,4703.99) 5712.5,4696.49 5692.5,4696.49 ccw(c5692.5,4688.99) 5692.5,4681.49 5712.5,4681.49 cw(c5712.5,4673.99) 5720,4673.99 5720,4465 5743.22,4441.78 5865,4441.78 v4(5872.35,4434.43)
  Inner2 w5: v4(5872.35,4434.43) 5879.7,4441.78 5893.22,4441.78 5915,4420 5915,4259.44 5986.7,4187.74 J1.2@6029.48,4187.74
ETH_TXP: J1.1 U1.92 | length 1657.1
  Top Layer w5: U1.92@5076.31,4848.11 5110.3,4848.11 5112.68,4845.74 5309.82,4845.74 5314.56,4841 5694.56,4841 5731,4804.56 5731,4469.56 5747.78,4452.78 5865,4452.78 v4(5872.35,4460.13)
  Inner2 w5: v4(5872.35,4460.13) 5879.7,4452.78 5897.78,4452.78 5926,4424.56 5926,4264 5960,4230 6060,4230 6129.48,4160.52 J1.1@6129.48,4137.74
FB: C41.1 R14.1 R15.2 U4.5 | length 197.4
  Top Layer w8: U4.5@3772.36,3978.73 C41.1@3772.36,3914.26 3774.77,3916.67 R14.1@3843.63,3916.67 R15.2@3843.63,3977.35
FB1: C44.1 R16.1 R17.2 U5.5 | length 197.4
  Top Layer w8: U5.5@4376.49,3978.73 C44.1@4376.49,3914.26 4378.9,3916.67 R16.1@4447.76,3916.67 R17.2@4447.76,3977.35
FB2: C47.1 R18.1 R19.2 U6.5 | length 197.4
  Top Layer w8: U6.5@4074.43,3978.73 C47.1@4074.43,3914.26 4076.83,3916.67 R18.1@4145.69,3916.67 R19.2@4145.69,3977.35
GND: C1.2 C2.1 C3.1 C4.1 C5.1 C6.1 C7.1 C8.1 C9.1 C10.1 C11.1 C12.1 C13.1 C14.1 C15.1 C16.2 C17.1 C18.1 C19.1 C20.1 C21.1 C22.1 C23.1 C25.2 C26.1 C27.1 C28.1 C29.2 C30.1 C31.1 C32.1 C33.1 C34.1 C35.1 C36.1 C37.1 C39.2 C40.1 C42.1 C43.1 C45.1 C46.1 C48.1 C49.1 C50.1 C51.1 C52.1 C53.1 C54.1 C55.1 C56.1 C59.1 C60.1 C61.1 C63.1 C64.1 C65.1 C66.2 C67.1 C69.1 C70.1 D1.1 H1.7 H1.9 H1.14 H1.16 J1.7 J1.8 J1.SH1 J1.SH2 LCD1.1 LCD1.8 pad.2 Q1.2 R3.2 R4.1 R5.2 R8.1 R15.1 R17.1 R19.1 R30.2 R31.2 R40.1 R45.1 RF1.1 RF1.2 RF1.3 SW1.4 SW2.1 SW3.1 SW4.1 SW5.1 U1.116 U1.129 U3.1 U4.2 U5.2 U6.2 U7.1 U7.3 U7.20 U7.31 U7.33 U7.36 U8.3 U10.6 U10.10 U10.11 U10.12 U10.13 U11.14 USB1.13 USB1.14 USB1.15 USB1.16 USB1.A1B12 USB1.B1A12 USB2.4 USB2.5 USB2.6 USB2.7 USB2.8 USB3.4 USB3.5 USB3.6 USB3.7 USB3.8 X2.2 X2.4 X3.2 X3.4 | length 1181.8
  Top Layer w8: v1(4705,4910) 4719.98,4924.98 U1.116@4719.98,4968.22
  Top Layer w10: v1(5640,5225) 5662.66,5202.34 U11.14@5662.66,5137.25 5662.66,5092.34 5692.28,5062.72 C67.1@5692.28,5049.08 5692.28,4979.33 C69.1@5692.03,4979.08
  Top Layer w20: USB1.14@3373.96,4056.57 3409.96,4092.57 USB1.B1A12@3409.96,4099.87 ; USB1.13@3373.96,4396.77 3409.96,4360.77 USB1.A1B12@3409.96,4353.67 ; v1(3825,4490) 3838.33,4476.67 U8.3@3890.27,4476.67 ; v1(3830,5225) 3832.3,5222.7 U7.20@3832.3,5157.79 ; v1(3895,5500) 3895.31,5500.31 U7.31@3962.22,5500.31 ; U7.33@3962.22,5571.17 4048.83,5571.17 v1(4050,5570) ; C3.1@4247.44,4476.07 C7.1@4247.44,4542.01 ; C4.1@4915,4144.45 C13.1@4985,4144.45 ; C35.1@5050,4144.45 C36.1@5115,4144.45 5117.4,4142.04 R8.1@5177.5,4142.04
  Bottom Layer w20: LCD1.8@3985,4732.75 4127.25,4732.75 v1(4150,4710)
  other v1: 4830,3700 4524.11,3736.33 4180.43,3738.72 3740,3745 3675,3780 3735,3810 4260,3845 3620.01,3846.57 3965,3850 3855,4080 4150,4080 3535,4085 4450,4085 5662.45,4090.32 5330,4100 5409.2,4117.17 3730,4125 3760,4125 3790,4125 4032.06,4125 4062.06,4125 4092.06,4125 4334.13,4125 4364.13,4125 4394.13,4125 5142.73,4128.87 4945,4130 5070,4130 4810,4135 4645,4140 3230,4170 5840,4230 5440,4240 3230,4265 5410,4285 5795,4330 4225,4340 3490,4345 5150,4350 5220,4350 5425,4415 5490,4455 5545.07,4455 5596.53,4468.14 5420,4485 5290,4495 5600,4520 4223.24,4593.6 5600,4605 5285,4610 4720,4625 4825,4625 5425,4635 5585,4640 3745,4645 5535,4650 4210,4680 3755,4705 4720,4705 4825.62,4705 5440,4745 3685.84,4750 3724.13,4750 6315,4775 5430,4785 6141.6,4794.03 3595,4800 4210,4800 5435,4865 5520,4895 5245,4910 5690,4925 5130,4940 5170,4965 5515,4995 5195,5000 4270.51,5035.55 5740,5085 3960,5095 4020,5095 3490,5140 4260,5140 3455,5175 5475,5195 4240,5220 4295,5230 3660,5235 5415,5235 3765,5240 5350,5240 5272.06,5271.33 5055,5275 5125,5275 5188.17,5274.92 4490,5280 4555,5280 4445,5290 4840,5290 3890,5295 6205,5330 3395,5365 3305,5370 3240,5375 3350,5375 5215,5375 3180,5385 3420,5390 4575,5395 3220,5400 3375,5410 3620,5410 3726,5410 6220,5415 5215,5430 4075,5435 3400,5445 3190,5455 3430,5465 4675,5465 6370,5470 4025,5485 4975,5500 3615,5510 3726,5511.07 3190,5526.1 3400,5540 3370,5555 4985,5565 5790,5570 3210,5575 3420,5575 5365,5575 4735,5580 3375,5585 3332.56,5600 3250,5610 3285.79,5612.67 3405,5620 6255,5630 6335,5630 4215,5635 4624.97,5635.34 5430,5635 5505,5635 5720,5635 3435,5640 4740,5650 5660,5650 4370,5655 4125,5690 4910,5725 5515,5730 4370,5735 4865,5735 5440,5735 5665,5740 5730,5740 6340,5740 6250,5745 4033.9,5788.88 4045,5855 4105,5870
  other v2: 6020,3725 6295,3745 5635,3770 4575,3875 6740,3900 5750,3975 4565,3980 3595,4055 5810,4115 3615,4135 4010,4340 4060,4380 6200,4405 4915,4450 5905,4480 5845,4485 4900,4490 3345,4570 3700,4570 6155,4650 3490,4700 6560,4765 5940,4775 4935,4820 6310,4835 4670,4885 4633.94,4907.01 3295,4945 4480,4985 6500.88,4989.47 3405,5065 6385,5120 3246.42,5121.71 3415,5130 4090,5220 6155,5225 5525.01,5253.04 5610,5255 4150,5325 4280,5335 6330,5340 6555,5345 5120,5370 5070,5380 5780,5480 5075,5485 3625,5705
  other v4: 5125,3730 4922.82,3735 5125,3769.76 4922.22,3785 5130,3830 4930,3835 5025,3835.9 5280,3880 5375,3890 5225,3955.26 5325,3955 5225,4005 5325,4005